# EAGLE board throughput (EAGLE 7.5.0)
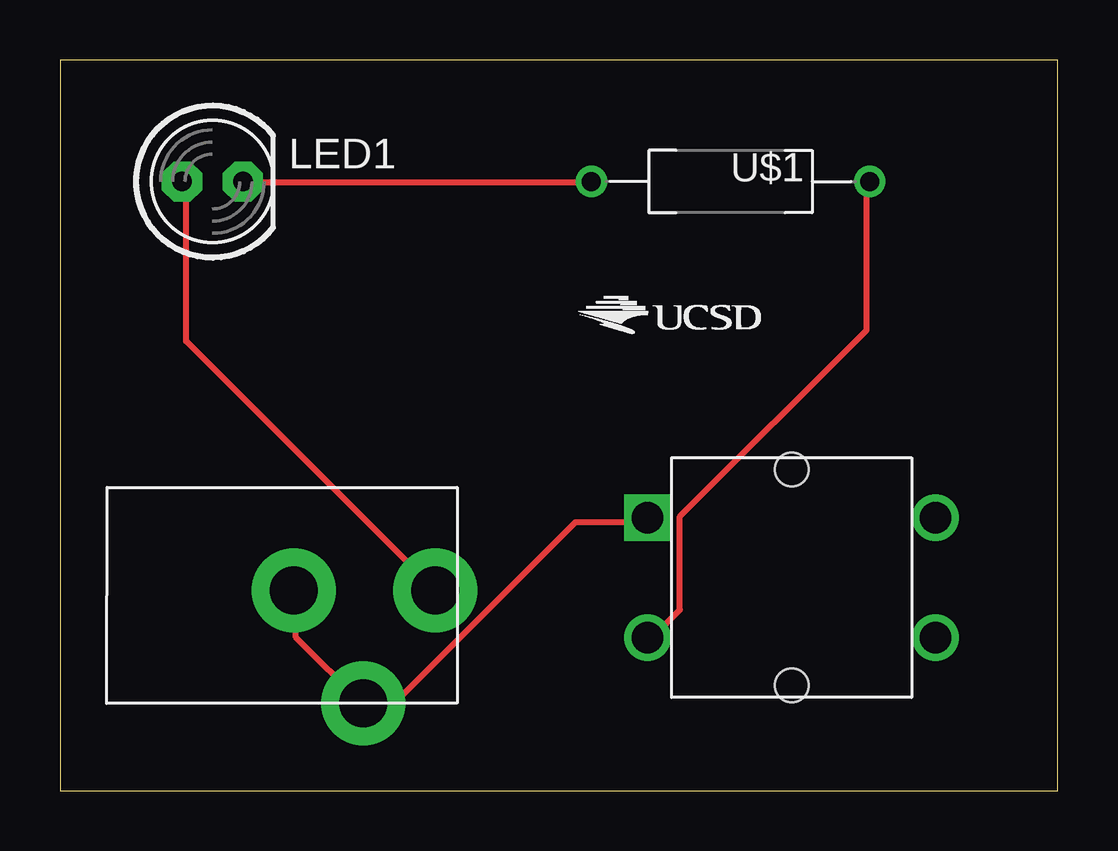
[diagram p0: board, top side]

Size 41.58 x 30.47 mm. Coordinates in mm from the lower left corner, seen from the top.
Outline: 0,0 41.58,0 41.58,30.47 0,30.47 0,0
Copper layers (1*16): Top 0.035mm / dielectric 1.5mm / Bottom 0.035mm
Design rules "default": minimum track width 10mil, minimum drill 0.6mm, track to track 8mil, track to pad 8mil, pad to pad 8mil, via to via 8mil, smd to smd 8mil, copper to edge 40mil, drill to drill 8mil, minimum pad ring 10mil, minimum via ring 8mil, stop-mask expansion 4mil, vias tented up to drill 0mil, thermal gap 10mil

## Footprints (pad centres in the part's own frame; a part is rotated, then mirrored left to right if it is on the bottom)
PJ-102A = drill 2 pad 3.5: RING -6.77,-4.345; RING_SW -3.87,-9.045; TIP -0.87,-4.345
LED5MM = drill 0.813 pad 1.676 octagon: A -1.27,0; K 1.27,0
BUTTON-TACTILE-SQUARE-ADAFRUIT1010 = drill 1.3 square: P -6,2.5 | drill 1.3: P2 6,2.5; S -6,-2.5; S2 6,-2.5 | hole 1.4: 0,4.5; 0,-4.5
RESAD1160W55L680D260_HS = drill 0.8 pad 1.2: 1 -5.8,0; 2 5.8,0

## Placement (x,y rotation side)
J1  2.1MMJACKTHM  [PJ-102A]  16.51,12.7 0 top
LED1  Red  [LED5MM]  6.35,25.4 0 top
S1  [BUTTON-TACTILE-SQUARE-ADAFRUIT1010]  30.48,8.89 0 top
U$1  330Ohms  [RESAD1160W55L680D260_HS]  27.94,25.4 0 top
U$2  [UCSD_LOGO]  21.59,19.05 0 top

## Library data of the parts
J1 LED1 U$1 = Lab2
S1 = Jasmine_Zhao_lab2
U$2 = Logos

## Nets
N$1: LED1.K U$1.1
N$2: S1.S U$1.2
N$3: J1.RING J1.RING_SW S1.P
N$4: J1.TIP LED1.A

## Tracks (layer width: path | path; a pad name or v marks a point on that pad's centre or on a via)
N$1
  Top 0.254: U$1.1 21.95,25.38 7.77,25.38 LED1.K
N$2
  Top 0.254: U$1.2 33.6,25.38 33.6,19.2 25.83,11.43 25.83,7.54 24.69,6.4 S1.S
N$3
  Top 0.254: S1.P 24.46,11.2 21.49,11.2 13.95,3.66 12.8,3.66 J1.RING_SW 12.57,3.66 9.83,6.4 9.83,8.23 J1.RING
N$4
  Top 0.254: LED1.A 5.26,25.38 5.26,18.75 15.54,8.46 J1.TIP